# Altium PCB PCB_nEEGlace_BMS.pcbdoc
Units mm, origin at the board's own origin, x right, y up, seen from the top; angles counter-clockwise.
Board outline 70.74 x 59.69 mm, 2 copper layers (Top Layer, Bottom Layer); 6 components, 10 nets, 34 pads, 12 vias.
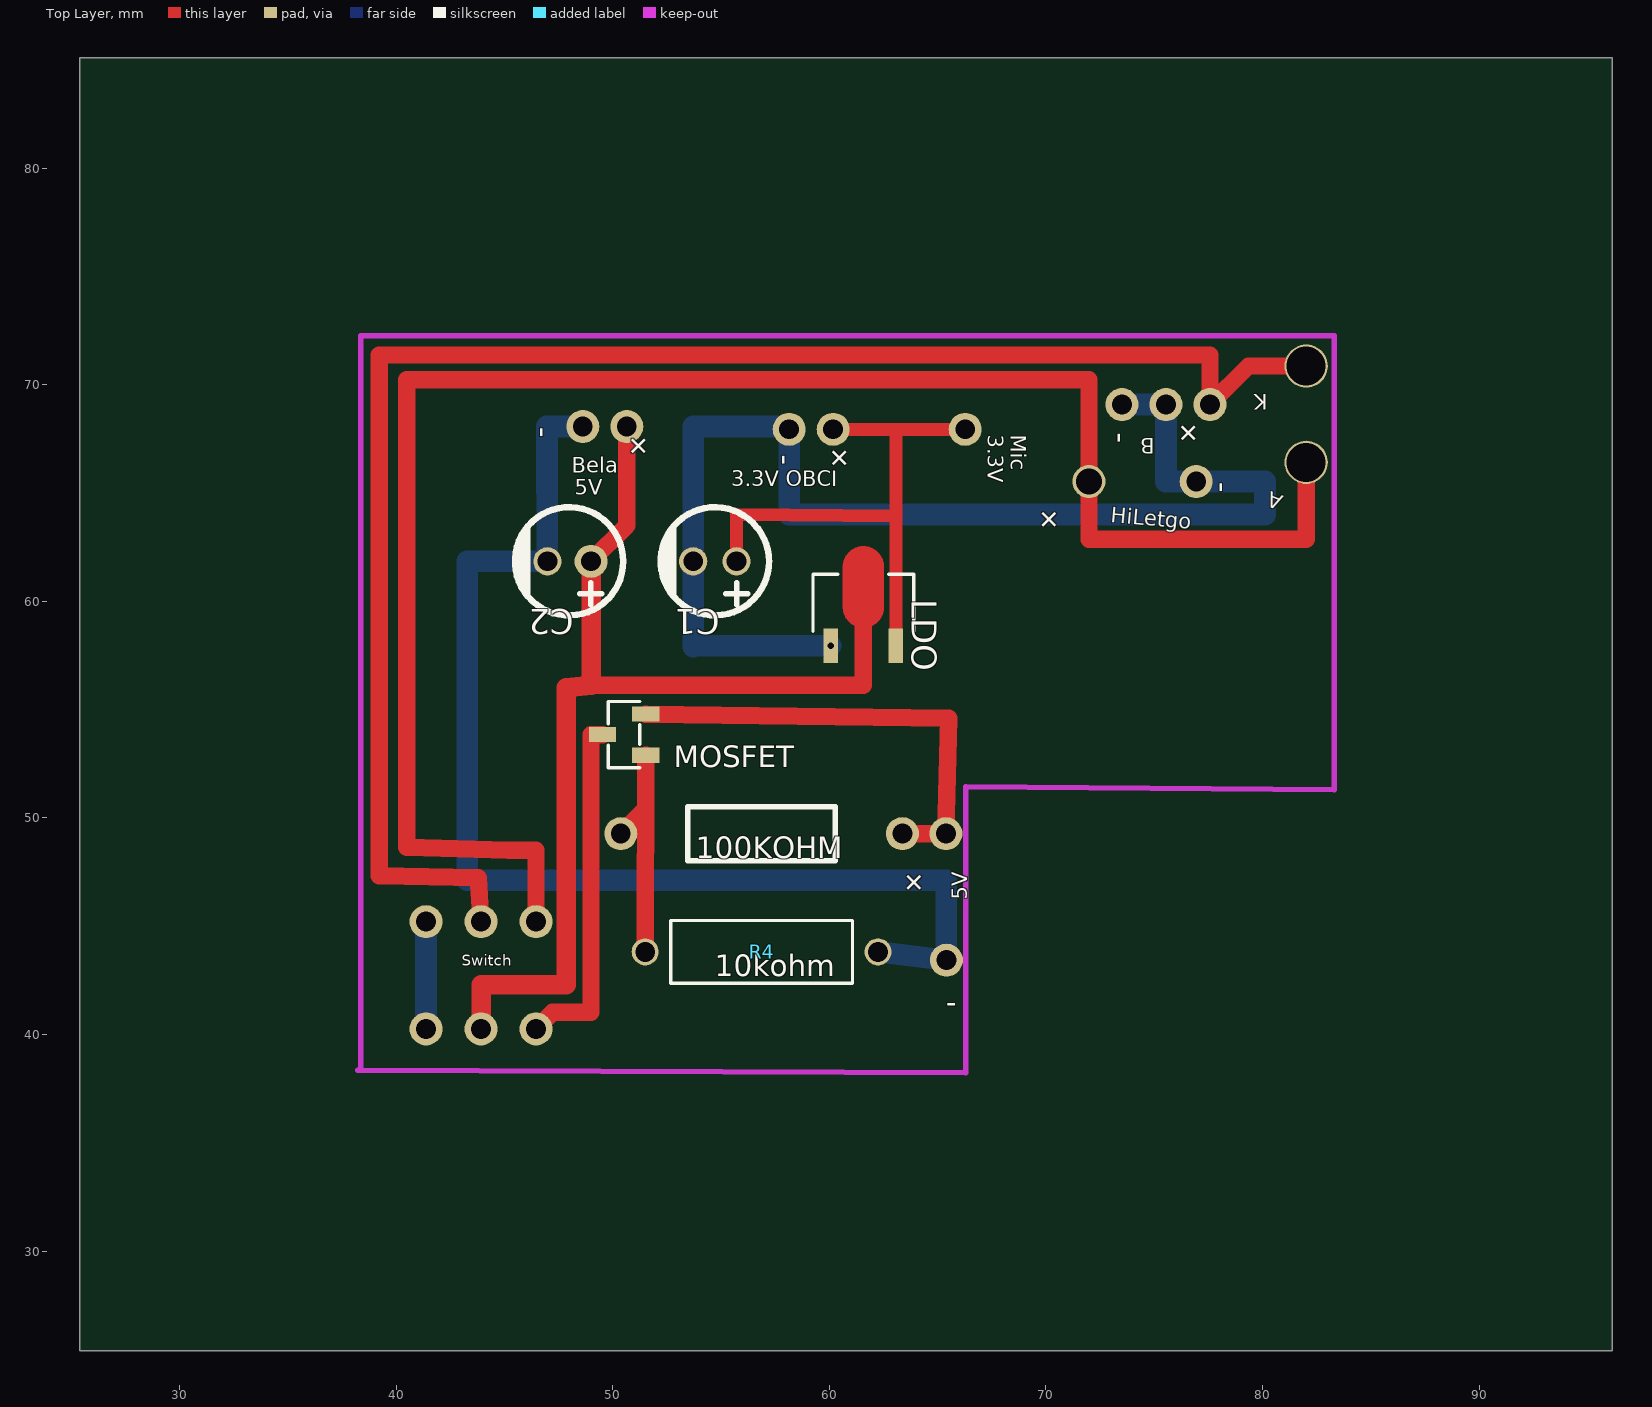
[diagram p0: Top Layer view]
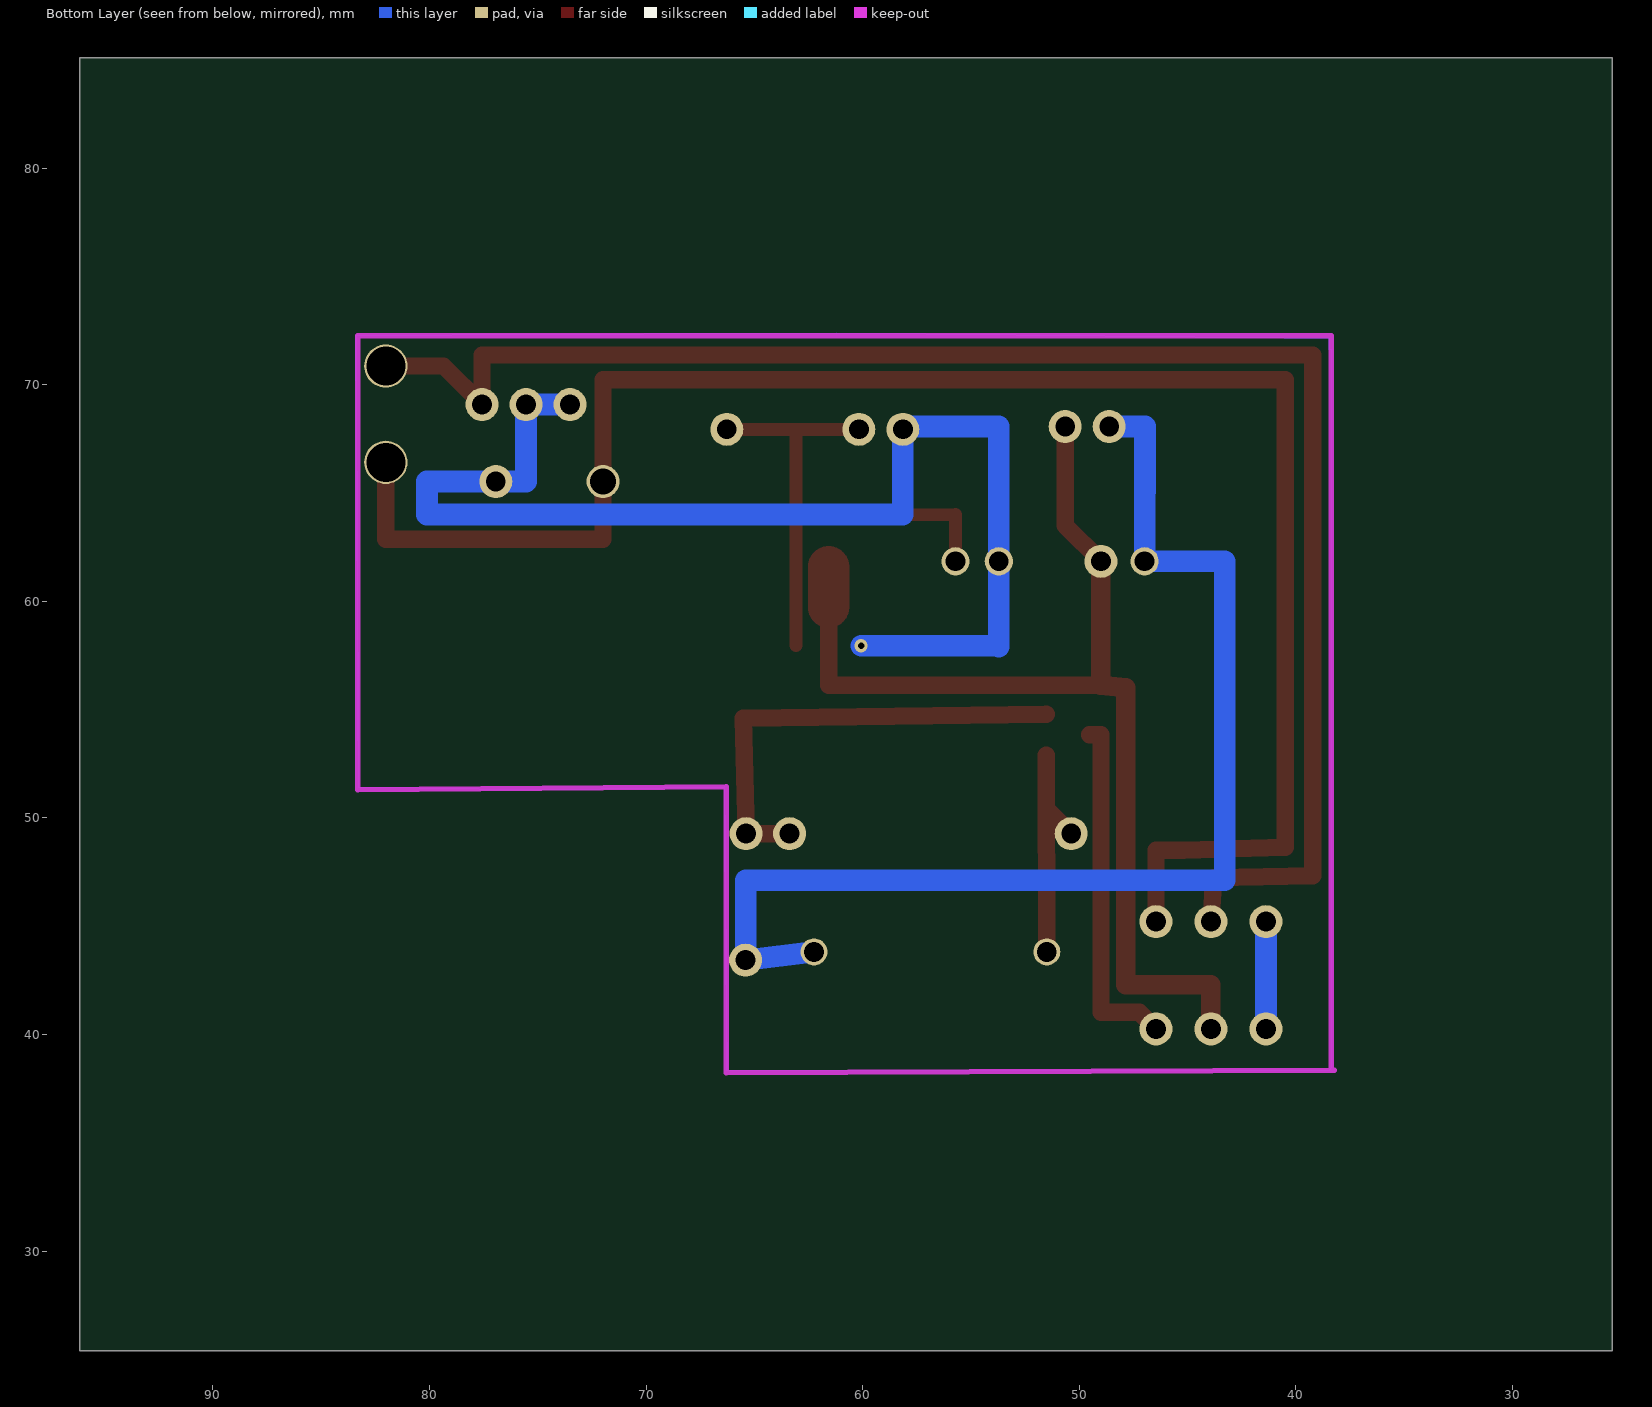
[diagram p1: Bottom Layer view, seen from below]

## Layer stack, top to bottom
Top Layer: signal copper (thickness not stored)
Dielectric: dielectric 0.32, FR-4, Dk 4.8
Bottom Layer: signal copper (thickness not stored)

## Board outline
96.139,25.4 25.4,25.4 25.4,85.09 96.139,85.09

## Components (designator, comment, footprint, x,y, rotation, side; value= is the part's Value field where it differs from the comment)
100KOHM "100KRESISTOR" 100KRESISTOR 56.873,49.276 r0 top
C1 "47uF" CAP-TH_BD5.0-P2.00-D0.8-FD#1 54.714,61.849 r180 top
C2 "47uF" CAP-TH_BD5.0-P2.00-D0.8-FD#2 47.983,61.849 r180 top
LDO "LDO" SOT-89-3_L4.5-W2.5-P1.50-LS4.2-BR 61.572,59.309 r270 top
MOSFET "SI2301CDS-T1-GE3-ES" SOT-23-3_L2.9-W1.3-P1.90-LS2.4-BR 50.523,53.848 r0 top
R4 "RESISTOR10K" RESISTOR10K 56.873,43.815 r0 top

## Footprints (in the part's own frame and the unit in brackets; to place one, negate y for a bottom-side part, rotate by r counter-clockwise, add the part's x,y. Pads: shape width x height; smd on the part's side, far side on the other; paste and mask are expansions set on the pad)
100KRESISTOR [mil]
  round 60 hole 36 paste+0 mask+2: 1(255.91,0) 2(-255.91,0)
  silkscreen extent -134,-49 134,49
CAP-TH_BD5.0-P2.00-D0.8-FD#1 [mm]
  round 1.3 hole 0.914 paste+0 mask+0.051: 1(-1,0) 2(1,0)
  silkscreen extent -2.5,-2.5 2.5,2.5
CAP-TH_BD5.0-P2.00-D0.8-FD#2 [mm]
  round 1.3 smd paste+0 mask+0.051: 1(-1,0)
  round 1.3 hole 0.914 paste+0 mask+0.051: 2(1,0)
  silkscreen extent -2.5,-2.5 2.5,2.5
RESISTOR10K [mm]
  round 1.245 hole 0.914 paste+0 mask+0.051: 1(-5.375,0) 2(5.375,0)
  silkscreen extent -4.2,-1.45 4.2,1.45
SOT-23-3_L2.9-W1.3-P1.90-LS2.4-BR [mm]
  rect 1.25x0.7 smd paste+0 mask+0.051: 1(1,-0.95) 2(1,0.95) 3(-1,0)
  silkscreen extent -0.73,-1.53 0.73,1.53
SOT-89-3_L4.5-W2.5-P1.50-LS4.2-BR [mm]
  rect 1.575x0.672 smd paste+0 mask+0.051: 1(1.356,-1.5) 3(1.356,1.5)
  Top Layer region: -2.283,0.95 -0.429,0.95 -0.384,0.949 -0.34,0.946 -0.296,0.94 -0.252,0.933 -0.208,0.924 -0.165,0.912 -0.123,0.899 -0.081,0.884 -0.04,0.866 0,0.847 0.04,0.826 0.078,0.803 0.115,0.779 0.151,0.752 0.185,0.724 0.219,0.695 0.251,0.664 0.281,0.631 0.31,0.597 0.337,0.562 0.362,0.525 0.386,0.488 0.408,0.449 0.428,0.409 0.447,0.33 2.144,0.33 2.144,-0.33 0.447,-0.33 0.428,-0.409 0.408,-0.449 0.386,-0.488 0.362,-0.526 0.337,-0.562 0.31,-0.597 0.281,-0.631 0.251,-0.664 0.219,-0.695 0.185,-0.725 0.151,-0.753 0.115,-0.779 0.078,-0.804 0.04,-0.827 0,-0.848 -0.04,-0.867 -0.081,-0.884 -0.123,-0.899 -0.165,-0.913 -0.208,-0.924 -0.252,-0.934 -0.296,-0.941 -0.34,-0.946 -0.384,-0.949 -0.429,-0.95 -2.283,-0.95 -2.328,-0.949 -2.372,-0.946 -2.416,-0.941 -2.46,-0.934 -2.504,-0.924 -2.547,-0.913 -2.589,-0.899 -2.631,-0.884 -2.672,-0.867 -2.713,-0.848 -2.752,-0.827 -2.79,-0.804 -2.827,-0.779 -2.863,-0.753 -2.898,-0.725 -2.931,-0.695 -2.963,-0.664 -2.993,-0.631 -3.022,-0.597 -3.049,-0.562 -3.075,-0.526 -3.098,-0.488 -3.12,-0.449 -3.141,-0.409 -3.159,-0.369 -3.175,-0.327 -3.189,-0.285 -3.202,-0.242 -3.212,-0.199 -3.22,-0.155 -3.227,-0.111 -3.231,-0.067 -3.233,-0.022 -3.233,0.022 -3.231,0.067 -3.227,0.111 -3.22,0.155 -3.212,0.199 -3.202,0.242 -3.189,0.285 -3.175,0.327 -3.159,0.369 -3.141,0.409 -3.12,0.449 -3.098,0.488 -3.075,0.525 -3.049,0.562 -3.022,0.597 -2.993,0.631 -2.963,0.664 -2.931,0.695 -2.898,0.724 -2.863,0.752 -2.827,0.779 -2.79,0.803 -2.752,0.826 -2.713,0.847 -2.672,0.866 -2.631,0.884 -2.589,0.899 -2.547,0.912 -2.504,0.924 -2.46,0.933 -2.416,0.94 -2.372,0.946 -2.328,0.949
  silkscreen extent -1.95,-2.33 0.7,2.33

## Free pads (board coordinates)
  round 1.524 hole 0.914 paste+0 mask+0.051: 1(65.405,43.434) 2(65.382,49.276) 4(76.939,65.532) 7(77.574,69.088) 8(75.542,69.088) 9(73.51,69.088) 10(41.379,40.259) 11(43.919,40.259) 12(46.459,40.259) 13(41.379,45.212) 14(43.919,45.212) 15(46.459,45.212) 18(60.175,67.945) 19(66.271,67.945) 20(58.143,67.945) 21(50.65,68.072) 22(48.618,68.072)
  round 1.524 hole 1.2 paste+0 mask+0.051: 6(71.986,65.532)
  round 1.524 hole 0.914 paste+0.102 mask+0.051: 23(48.999,61.849)
  round 2 hole 1.8 paste+0 mask+0.051: 29(82.019,70.866) 30(82.019,66.421)

## Via types
v1: diameter 0.61, hole 0.305, Top Layer to Bottom Layer, tented both sides, 10 vias
v2: diameter 0.62, hole 0.305, Top Layer to Bottom Layer, tented both sides, 2 vias

## Nets (pads, with @x,y where several pads share a name; then routed paths per layer and width w, separated by ;. In a path a pad name is that pad's centre, name@x,y a point inside that pad or via, vN(x,y) a via of type N, cw(c..) or ccw(c..) an arc to the next point about the centre after c; other vN are vias at no path point)
3.3V: C1.1 LDO.3 pad.18 pad.19 | length 41.6
  Top Layer w0.6: C1.1 55.715,64.008 63.073,63.944 LDO.3 ; pad.18 63.073,67.945 ; pad.19 63.073,67.945 ; LDO.3 63.073,67.945 ; LDO.3 63.073,67.945
5V: C2.1 pad.11 pad.21 pad.23 | length 82.8
  Top Layer w0.8: pad.11 43.932,42.304 47.856,42.304 47.856,56.007 48.999,56.134 ; pad.23 48.999,56.134 ; pad.21 50.65,63.5 C2.1 48.999,56.134 ; 61.572,60.665 61.572,56.134 48.999,56.134
  Top Layer w0.902: pad.11 43.932,42.304 47.856,42.304 47.856,56.007 48.999,56.134 pad.23
B: pad.7 pad.14 pad.29 | length 76.5
  Top Layer w0.8: pad.14 43.792,47.244 39.22,47.328 39.22,71.374 77.574,71.374 pad.7 79.352,70.866 pad.29
D: MOSFET.3 pad.12 | length 16.2
  Top Layer w0.8: pad.12 47.221,41.021 48.999,41.021 48.999,53.848 MOSFET.3
G: 100KOHM.2 MOSFET.1 R4.1 | length 13.2
  Top Layer w0.8: 100KOHM.2 51.523,50.426 MOSFET.1 R4.1
GND: C1.2 C2.2 LDO.1 pad.1 pad.4 pad.8 pad.9 pad.10 pad.13 pad.20 pad.22 R4.2 | length 118.8
  Bottom Layer w1: v1(41.379,40.259) v1(41.379,45.212) ; v1(48.618,68.072) 46.967,68.072 C2.2 43.284,61.849 43.284,47.117 65.405,47.117 v1(65.405,43.434) v1(62.248,43.815) ; v1(60.072,57.953) 53.755,57.953 53.714,57.912 C1.2 53.714,68.072 58.016,68.072 v1(58.143,67.945) 58.143,64.008 80.114,64.008 80.114,65.532 v1(76.939,65.532) 75.542,65.532 v1(75.542,69.088) 74.442,69.088 v1(73.51,69.088)
  other v2: 65.405,43.434 76.939,65.659
H: pad.6 pad.15 pad.30 | length 83.3
  Top Layer w0.8: pad.15 46.459,48.514 45.189,48.514 40.49,48.641 40.49,70.231 71.986,70.231 pad.6 71.986,62.865 82.019,62.865 pad.30
H+: 
S: 100KOHM.1 MOSFET.2 pad.2 | length 21.3
  Top Layer w0.8: MOSFET.2@51.523,54.788 65.509,54.61 pad.2 100KOHM.1
S$653: 

## Polygon pours and split planes (outlines as drawn)
GND on Bottom Layer (solid): 38.458,38.354 38.331,38.481 38.331,71.628 38.458,71.628 38.458,72.136 61.191,72.39 83.416,72.263 83.289,51.435 74.907,51.308 66.398,51.435 66.271,38.354 38.458,38.354

## Silkscreen, mask and mechanical layers (free items; w line width, h text height)
Top Overlay:
  text "K" at 80.241,69.565 h0.7 r180
  text "+" at 51.292,67.877 h1 r225
  text "Mic / 3.3V" at 67.318,67.691 h0.7 r270
  text "+" at 77.293,67.664 h1 r135
  text "-" at 47.086,67.564 h1 r90
  text "B" at 75.034,67.533 h0.7 r180
  text "-" at 73.756,67.31 h1 r90
  text "+" at 61.164,66.521 h1 r135
  text "-" at 58.262,66.294 h1 r90
  text "Bela" at 48.11,65.944 h0.7
  text "3.3V OBCI" at 55.476,65.309 h0.7
  text "-" at 78.455,65.024 h1 r90
  text "5V" at 48.237,64.928 h0.7
  text "A" at 81.002,64.843 h0.7 r159
  text "+" at 70.236,64.489 h1 r225
  text "HiLetgo" at 72.972,63.659 h0.7 r355
  text "+" at 64.013,47.725 h1 r225
  text "5V" at 66.367,46.228 h0.7 r90
  text "Switch" at 43.03,43.184 h0.5
  text "-" at 65.89,41.775 h1 r180
Top Solder:
  lines w0.702: 55.715,64.008 63.073,63.944 ; 55.715,64.008 55.715,61.849 55.715,64.008 ; 55.715,64.008 63.073,63.944 ; 63.073,57.953 63.073,67.945 ; 63.073,57.953 63.073,67.945 ; 63.073,57.953 63.073,63.944 ; 63.073,57.953 63.073,63.944 ; 63.073,57.953 63.073,67.945 ; 63.073,57.953 63.073,67.945 ; 63.073,67.945 66.271,67.945 63.073,67.945 ; 63.073,67.945 60.175,67.945 63.073,67.945
  lines w0.702 net 3.3V: 55.715,61.849 55.715,64.008 63.073,63.944 63.073,57.953
  lines w0.902: 43.919,40.259 43.932,42.304 47.856,42.304 47.856,56.007 48.999,56.134 ; 43.919,45.212 43.792,47.244 39.22,47.328 39.22,71.374 77.574,71.374 77.574,69.088 79.352,70.866 82.019,70.866 ; 46.459,40.259 47.221,41.021 48.999,41.021 ; 46.459,45.212 46.459,48.514 45.189,48.514 40.49,48.641 40.49,70.231 71.986,70.231 71.986,65.532 ; 46.586,40.259 47.348,41.021 48.999,41.021 ; 48.999,61.849 48.999,56.134 ; 63.373,49.276 65.382,49.276 ; 48.983,61.849 48.999,56.134 ; 48.983,61.849 50.65,63.5 ; 48.983,61.849 48.999,56.134 ; 48.983,61.849 50.65,63.5 ; 48.983,61.849 48.999,56.134 ; 48.983,61.849 48.999,56.134 ; 48.983,61.849 48.999,56.134 ; 48.983,61.849 48.999,56.134 ; 48.983,61.849 48.999,56.134 ; 48.999,41.021 48.999,53.848 ; 48.999,41.021 48.999,53.848 ; 48.999,53.848 49.522,53.848 48.999,53.848 ; 48.999,56.134 61.572,56.134 ; 48.999,56.134 61.572,56.134 ; 48.999,56.134 61.572,56.134 ; 48.999,56.134 61.572,56.134 ; 48.999,56.134 61.572,56.134 ; 48.999,56.134 61.572,56.134 ; 48.999,56.134 61.572,56.134 ; 48.999,56.134 61.572,56.134 ; 50.65,63.5 50.65,68.072 50.65,63.5 ; 51.523,50.426 50.373,49.276 51.523,50.426 ; 51.523,50.426 51.523,52.898 ; 51.523,52.898 51.498,43.815 51.523,52.898 ; 51.523,54.788 51.523,54.788 ; 51.523,54.788 65.509,54.61 ; 51.523,54.788 51.523,54.788 ; 51.523,54.788 65.509,54.61 ; 61.572,56.134 61.572,60.665 ; 61.572,56.134 61.572,60.665 ; 61.572,56.134 61.572,60.665 ; 61.572,56.134 61.572,60.665 ; 61.572,56.134 61.572,60.665 ; 61.572,56.134 61.572,60.665 ; 61.572,56.134 61.572,60.665 ; 65.382,49.276 65.509,54.61 ; 65.382,49.276 65.509,54.61 ; 71.986,62.865 82.019,62.865 ; 71.986,62.865 71.986,65.532 ; 71.986,62.865 82.019,62.865 ; 71.986,62.865 71.986,65.532 ; 82.019,62.865 82.019,66.421 82.019,62.865
  lines w1.003: 43.919,40.259 43.932,42.304 47.856,42.304 47.856,56.007 48.999,56.134 48.999,61.849
Bottom Solder:
  lines w1.102: 41.379,40.259 41.379,45.212 ; 48.618,68.072 46.967,68.072 46.982,61.849 ; 60.072,57.953 53.755,57.953 53.714,57.912 53.714,61.849 53.714,68.072 58.016,68.072 58.143,67.945 ; 43.284,47.625 43.284,61.849 ; 43.284,47.625 65.382,47.625 ; 43.284,47.625 43.284,61.849 ; 43.284,47.625 65.382,47.625 ; 43.284,47.625 43.284,61.849 ; 43.284,47.625 65.382,47.625 ; 43.284,61.849 46.982,61.849 ; 43.284,61.849 43.03,46.863 65.255,46.609 65.405,43.434 ; 43.284,61.849 46.982,61.849 ; 43.284,61.849 46.982,61.849 ; 43.284,61.849 46.982,61.849 ; 58.143,64.008 58.143,67.945 ; 58.143,64.008 80.137,64.008 ; 58.143,64.008 58.143,67.945 ; 58.143,64.008 80.137,64.008 ; 65.382,47.625 65.405,43.434 ; 65.382,47.625 65.405,43.434 ; 65.382,47.625 65.405,43.434 ; 65.405,43.434 62.248,43.815 65.405,43.434 ; 80.137,64.008 80.137,65.532 ; 80.137,64.008 80.137,65.532 ; 80.137,65.532 80.137,65.786 ; 80.137,65.532 80.137,65.786 ; 80.137,65.786 76.939,65.786 80.137,65.786

## Text inside footprints (layer, text, board x,y; h text height)
R4: Top Overlay "10kohm" at 54.714,42.68 h1